# Altium PCB mother board.PcbDoc
Units mil, origin at the board's own origin, x right, y up, seen from the top; angles counter-clockwise.
Board outline 3937.01 x 1614.17 mil, 2 copper layers (Top Layer, Bottom Layer); 27 components, 51 nets, 76 pads, 0 vias.
Unrouted connection lines stored in the file: 27.
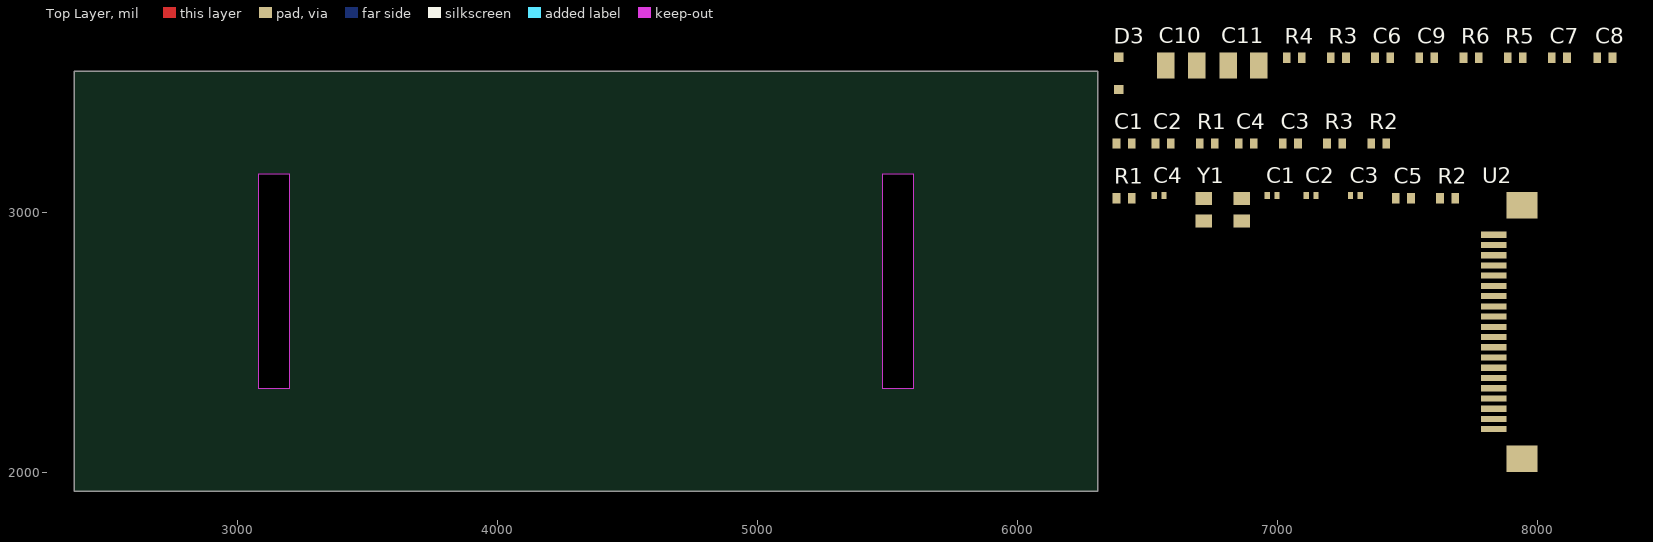
[diagram p0: Top Layer view]
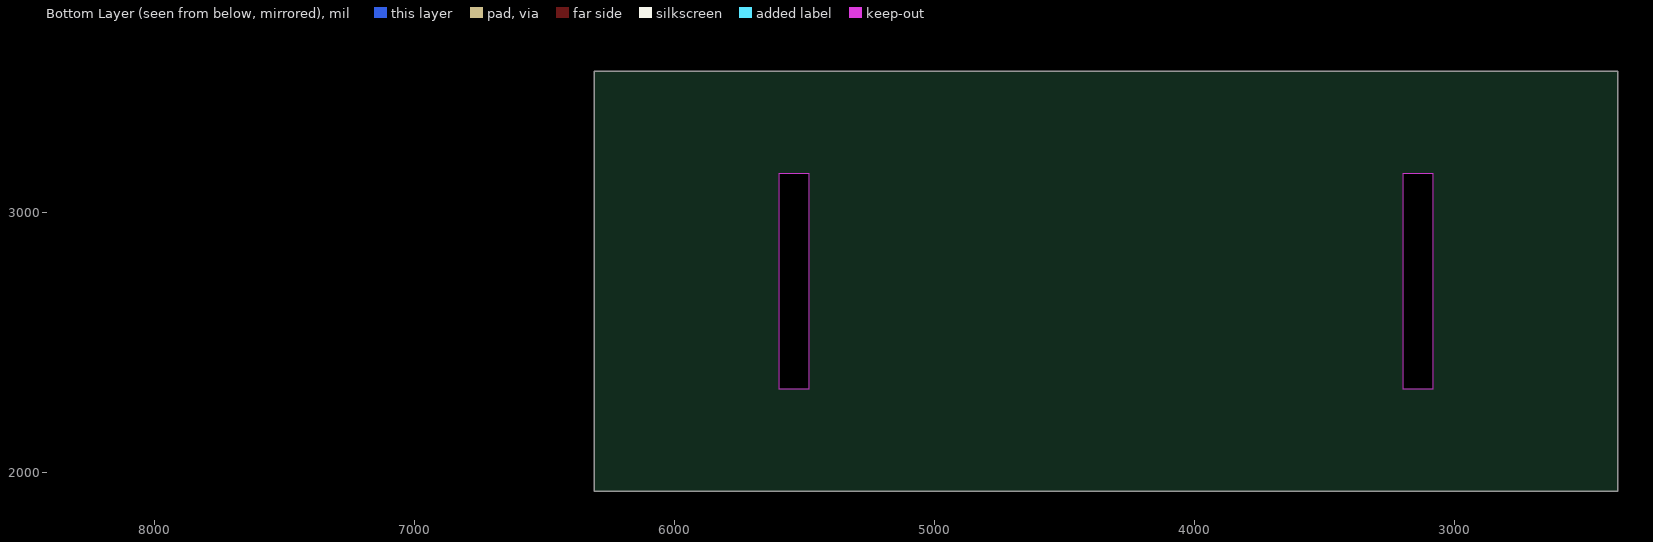
[diagram p1: Bottom Layer view, seen from below]

## Layer stack, top to bottom
Top Solder: solder mask 0.4, Solder Resist, Dk 3.5
Top Layer: signal copper 1.4
Dielectric 1: dielectric 12.6, FR-4, Dk 4.8
Bottom Layer: signal copper 1.4
Bottom Solder: solder mask 0.4, Solder Resist, Dk 3.5

## Board outline
2371.5,3542.09 2371.5,1927.91 6308.5,1927.91 6308.5,3542.09
cut-out: 5599.84,2321.61 5481.73,2321.61 5481.73,3148.39 5599.84,3148.39
cut-out: 3198.27,2321.61 3080.16,2321.61 3080.16,3148.39 3198.27,3148.39

## Design rules (kind name [scope] priority, off if disabled: settings)
Clearance [All] p1: gap=10 ignorepadtopadclearanceinfootprint=FALSE except(0: Arc-Hole Track-Hole SMDPad-Hole THPad-Hole Via-Hole Fill-Hole Poly-Hole Region-Hole Text-Hole)
PolygonConnect [All] p1: connectstyle=Relief reliefconductorwidth=10 reliefentries=4 polygonreliefangle="90 Angle" airgapwidth=10
RoomDefinition USB [InComponentClass('USB')] p1: confinementstyle=ConfineIn formatcopy=TRUE lockcomponents=FALSE outline 6350,3235 8340,3235 8340,3730 6350,3730
RoomDefinition "U_USB Hub" [InComponentClass('U_USB Hub')] p2: confinementstyle=ConfineIn formatcopy=TRUE lockcomponents=FALSE outline 6355,2930 7735,2930 7735,3725 6355,3725
RoomDefinition "main sheet" [InComponentClass('main sheet')] p3: confinementstyle=ConfineIn formatcopy=TRUE lockcomponents=FALSE outline 6355,1990 8100,1990 8100,3395 6355,3395
RoutingVias [All] p1: holewidth=28 width=50 viastyle="Through Hole" minholewidth=28 minwidth=50 maxholewidth=28 maxwidth=50
SolderMaskExpansion [All] p1: expansion=4
Width [All] p1: maxlimit=10 minlimit=10 preferedwidth=10
30 further rules are at their usual default settings.

## Classes and differential pairs
component class USB: C6 C7 C8 C9 C10 C11 D1 D2 D3 R3 R4 R5 R6 U3 U5
component class "U_USB Hub": C1 C2 C3 C4 R1 R2 R3 U? Y1
component class "main sheet": C1 C2 C3 C4 C5 R1 R2 U1 U2 VD3 Y1

## Components (designator, comment, footprint, x,y, rotation, side; value= is the part's Value field where it differs from the comment)
C1 "0.1mF" cap0402 6980,3065 r0 top
C1 "22pF" cap0603 6410,3265 r0 top
C2 "0.1mF" cap0402 7130,3065 r0 top
C2 "22pF" cap0603 6560,3265 r0 top
C3 "0.1mF" cap0402 7300,3065 r0 top
C3 "10uF" cap0603 7050,3265 r0 top
C4 "0.1mF" cap0402 6545,3065 r0 top
C4 "10uF" cap0603 6880,3265 r0 top
C5 "22p" cap0603 7485,3055 r0 top
C6 "0.1mF" cap0603 7405,3595 r0 top
C7 "0.1mF" cap0603 8085,3595 r0 top
C8 "0.1mF" cap0603 8260,3595 r0 top
C9 "0.1mF" cap0603 7575,3595 r0 top
C10 "22uF" "Tantal B" 6630,3565 r0 top
C11 "22uF" "Tantal B" 6870,3565 r0 top
D3 "Diode SMD" SOD123 6390,3535 r90 top
R1 "27R" res0603 6410,3055 r0 top
R1 "2.7k" res0603 6730,3265 r0 top
R2 "10K" res0603 7655,3055 r0 top
R2 "100k" res0603 7390,3265 r0 top
R3 "10k" res0603 7220,3265 r0 top
R3 "1K" res0603 7235,3595 r0 top
R4 "1K" res0603 7065,3595 r0 top
R5 "1K" res0603 7915,3595 r0 top
R6 "1K" res0603 7745,3595 r0 top
U2 "FFC/FPC Jack 20" "FFC/FPC Jack 20" 7895,2540 r90 top
Y1 "16MHz" QSMD5.0x3.2x1.0 6790,3010 r0 top

## Footprints (in the part's own frame and the unit in brackets; to place one, negate y for a bottom-side part, rotate by r counter-clockwise, add the part's x,y. Pads: shape width x height; smd on the part's side, far side on the other; paste and mask are expansions set on the pad)
cap0402 [mm]
  rect 0.5x0.65 smd: 1(-0.48,0) 2(0.48,0)
  body extent -0.5,-0.25 0.5,0.25, height 0.49
cap0603 [mm]
  rect 0.75x1.016 smd: 1(-0.74,0) 2(0.74,0)
  body extent -0.8,-0.4 0.8,0.4, height 0.88
"FFC/FPC Jack 20" [mm]
  rect 0.6x2.5 smd: 1(-9.5,1.6) 2(-8.5,1.6) 3(-7.5,1.6) 4(-6.5,1.6) 5(-5.5,1.6) 6(-4.5,1.6) 7(-3.5,1.6) 8(-2.5,1.6) 9(-1.5,1.6) 10(-0.5,1.6) 11(0.5,1.6) 12(1.5,1.6) 13(2.5,1.6) 14(3.5,1.6) 15(4.5,1.6) 16(5.5,1.6) 17(6.5,1.6) 18(7.5,1.6) 19(8.5,1.6) 20(9.5,1.6)
  rect 2.6x3 smd: 21(-12.38,-1.17) 22(12.38,-1.17)
  body extent -13.5,-5 13.5,1.9, height 2.49
QSMD5.0x3.2x1.0 [mm]
  rect 1.6x1.25 smd: 1(-1.85,-1.1) 2(1.85,1.1) 3(-1.85,1.1) 3(1.85,-1.1)
  body extent -2.5,-1.6 2.5,1.6, height 1.19
res0603 [mm]
  rect 0.75x1.016 smd: 1(-0.74,0) 2(0.74,0)
  body extent -0.8,-0.4 0.8,0.4, height 0.49
SOD123 [mm]
  rect 0.9x0.95 smd: 1(1.575,0) 2(-1.575,0)
  body extent -1.85,-0.77 1.85,0.78, height 1.25
"Tantal B" [mm]
  rect 1.7x2.54 smd: 1(1.5,0) 2(-1.5,0)
  body extent -1.75,-1.4 1.75,1.4, height 1.91

## Part data
C1 C1 C2 C2 C3 C3 C4 C4 C5 C6 C7 C8 C9: library part "Cap SMD"
C10 C11: library part "Cap Tantal"
R1 R1 R2 R2 R3 R3 R4 R5 R6: library part "Resistor SMD"
Y1: library part Crystal, "Кварцевый резонатор"

## Nets (pads, with @x,y where several pads share a name; then routed paths per layer and width w, separated by ;. In a path a pad name is that pad's centre, name@x,y a point inside that pad or via, vN(x,y) a via of type N, cw(c..) or ccw(c..) an arc to the next point about the centre after c; other vN are vias at no path point)
+3V3: C8.2 C11.2
+5: C1.2@6998.9,3065 C2.2@7148.9,3065 C3.2@7318.9,3065 R2.2@7684.13,3055 U2.19
AREF: C4.2@6563.9,3065
CS: U2.18
D+: 
D-: 
DB0: U2.14
DB1: U2.13
DB2: U2.12
DB3: U2.11
DB4: U2.10
DB5: U2.9
DB6: U2.8
DB7: U2.7
DM1: 
DM2: 
DM3: 
DM4: 
DM5: 
DM6: 
DM7: 
DP1: 
DP2: 
DP3: 
DP4: 
DP5: 
DP6: 
DP7: 
DTR: C9.1
GND: C1.1 C2.1 C3.1 C4.1 C5.1 C6.1 C7.2 C8.1 C10.1 C11.1 R1.1@6700.87,3265 U2.20
M8RX: R5.1
M8TX: R6.1
NetD1_2: R3.1@7205.87,3595
NetD2_2: R4.1
NetR1_1: R1.1@6380.87,3055
NetR1_2: R1.2@6759.13,3265
NetR3_2: R3.2@7249.13,3265
OVCJ: R2.2@7419.13,3265
PE0: R5.2
PE1: R6.2
RESET: C5.2 C9.2 R2.1@7625.87,3055 U2.15
RS: U2.17
RX: 
TX: 
USBVCC: C7.1 D3.1 R2.1@7360.87,3265 R3.1@7190.87,3265
VD18: C4.2@6909.13,3265
VD33: C3.2@7079.13,3265
WR: U2.16
XIN: C2.2@6589.13,3265
XOUT: C1.2@6439.13,3265 Y1.1
XTAL1: Y1.2
pads on no net: C6.2 C10.2 D3.2 R1.2@6439.13,3055 R3.2@7264.13,3595 R4.2 U2.1 U2.2 U2.3 U2.4 U2.5 U2.6 U2.21 U2.22 Y1.3